# Altium PCB CounterPcb.PcbDoc
Units mm, origin at the board's own origin, x right, y up, seen from the top; angles counter-clockwise.
Board outline 152.4 x 101.6 mm, 2 copper layers (Top Layer, Bottom Layer); 12 components, 36 nets, 138 pads, 3 vias.
Unrouted connection lines stored in the file: 25.
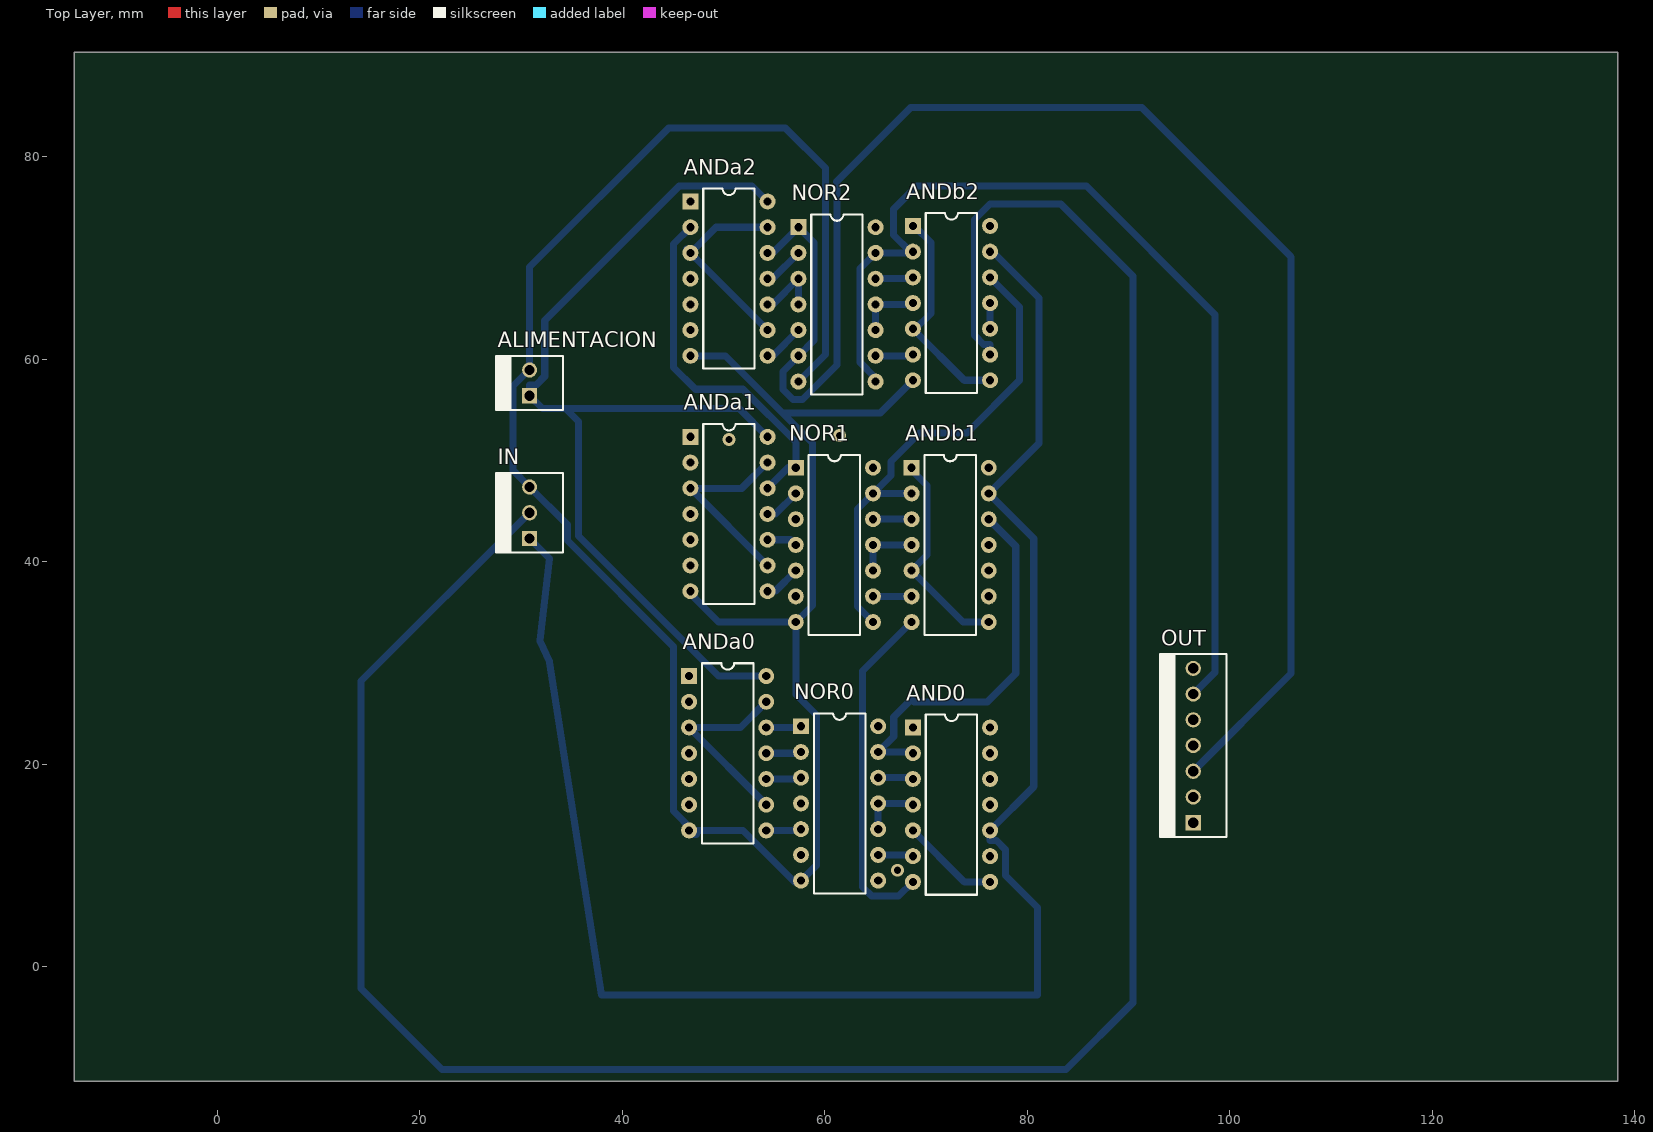
[diagram p0: Top Layer view]
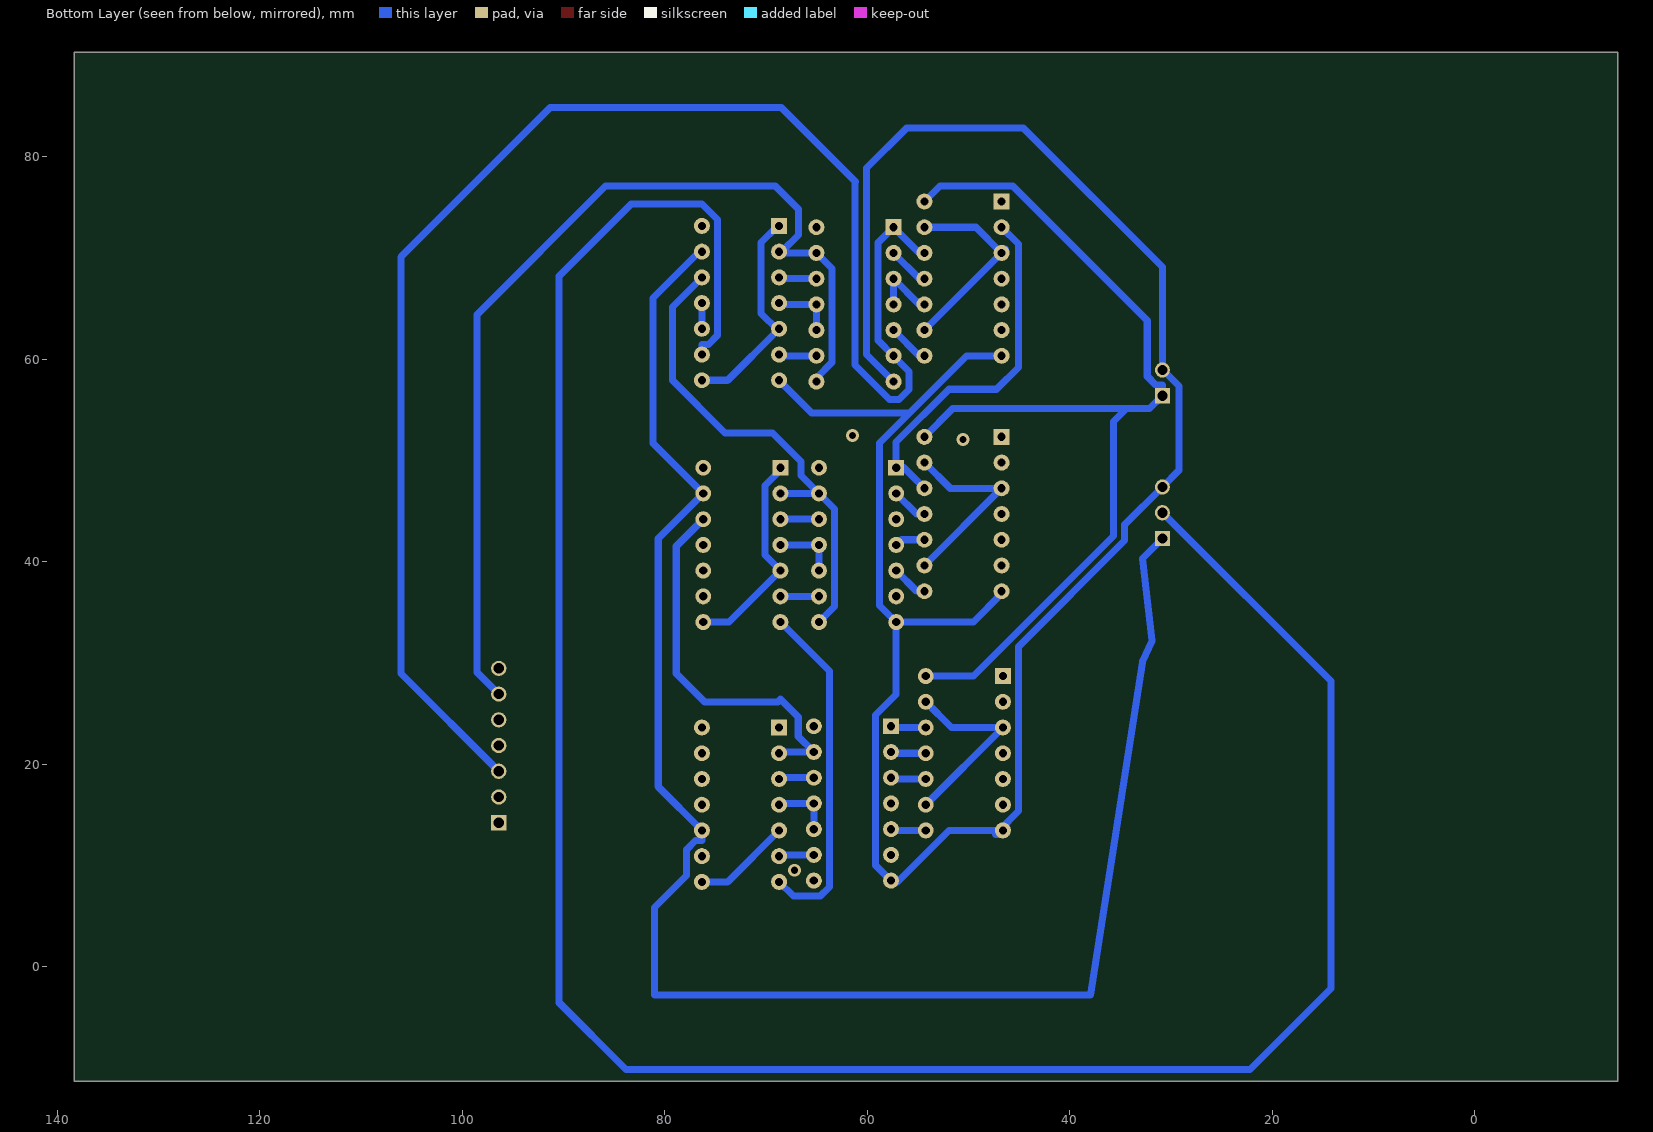
[diagram p1: Bottom Layer view, seen from below]

## Layer stack, top to bottom
Top Solder: solder mask 0.0102, Solder Resist, Dk 3.5
Top Layer: signal copper 0.0356
Dielectric 1: dielectric 0.32, FR-4, Dk 4.8
Bottom Layer: signal copper 0.0356
Bottom Solder: solder mask 0.0102, Solder Resist, Dk 3.5

## Board outline
-14.097,-11.303 138.303,-11.303 138.303,90.297 -14.097,90.297

## Design rules (kind name [scope] priority, off if disabled: settings)
Clearance [All] p1: gap=0.4 ignorepadtopadclearanceinfootprint=FALSE
PolygonConnect [All] p1: connectstyle=Relief reliefconductorwidth=0.254 reliefentries=4 polygonreliefangle="90 Angle" airgapwidth=0.254
RoutingVias [All] p1: holewidth=0.5 width=2 viastyle="Through Hole" minholewidth=0.3 minwidth=1.5 maxholewidth=0.5 maxwidth=2
SolderMaskExpansion [All] p1: expansion=0.102
Width [All] p1: maxlimit=0.9 minlimit=0.6 preferedwidth=0.7
30 further rules are at their usual default settings.

## Components (designator, comment, footprint, x,y, rotation, side; value= is the part's Value field where it differs from the comment)
ALIMENTACION "MOLEX2" MOLEX2 30.861,56.388 r90 top
AND0 "74HC08" DIP14 68.707,23.622 r0 top
ANDa0 "74HC08" DIP14 46.609,28.702 r0 top
ANDa1 "74HC08" DIP14 46.736,52.324 r0 top
ANDa2 "74HC08" DIP14 46.736,75.565 r0 top
ANDb1 "74HC08" DIP14 68.58,49.276 r0 top
ANDb2 "74HC08" DIP14 68.707,73.152 r0 top
IN "MOLEX3" MOLEX3 30.861,42.291 r90 top
NOR0 "74HC02" DIP14 57.658,23.749 r0 top
NOR1 "74HC02" DIP14 57.15,49.276 r0 top
NOR2 "74HC02" DIP14 57.404,73.025 r0 top
OUT "MOLEX7" MOLEX7 96.393,14.224 r90 top

## Footprints (in the part's own frame and the unit in brackets; to place one, negate y for a bottom-side part, rotate by r counter-clockwise, add the part's x,y. Pads: shape width x height; smd on the part's side, far side on the other; paste and mask are expansions set on the pad)
DIP14 [mil]
  rect 62x62 hole 32: 1(0,0)
  round 62 hole 32: 2(0,-100) 3(0,-200) 4(0,-300) 5(0,-400) 6(0,-500) 7(0,-600) 8(300,-600) 9(300,-500) 10(300,-400) 11(300,-300) 12(300,-200) 13(300,-100) 14(300,0)
  silkscreen extent 50,-650 250,50, body extent -5,-675 305,75, height 165
MOLEX2 [mm]
  rect 1.5x1.5 hole 1.016: 1(0,0)
  round 1.5 hole 1.016: 2(2.54,0)
  silkscreen extent -1.4,-3.3 3.94,3.3, body extent -1.27,-3.17 3.81,3.18, height 10.74
MOLEX3 [mm]
  rect 1.5x1.5 hole 1.016: 1(0,0)
  round 1.5 hole 1.016: 2(2.54,0) 3(5.08,0)
  silkscreen extent -1.4,-3.3 6.48,3.3, body extent -1.27,-3.17 6.35,3.18, height 10.74
MOLEX7 [mm]
  rect 1.5x1.5 hole 1.016: 1(0,0)
  round 1.5 hole 1.016: 2(2.54,0) 3(5.08,0) 4(7.62,0) 5(10.16,0) 6(12.7,0) 7(15.24,0)
  silkscreen extent -1.4,-3.3 16.64,3.3, body extent -1.27,-3.17 16.51,3.18, height 10.74

## Part data
AND0 ANDa0 ANDa1 ANDa2 ANDb1 ANDb2 NOR0 NOR1 NOR2: library part IC_DIP14

## Via types
v1: diameter 1.27, hole 0.711, Top Layer to Bottom Layer, 3 vias

## Nets (pads, with @x,y where several pads share a name; then routed paths per layer and width w, separated by ;. In a path a pad name is that pad's centre, name@x,y a point inside that pad or via, vN(x,y) a via of type N, cw(c..) or ccw(c..) an arc to the next point about the centre after c; other vN are vias at no path point)
+VCC: ALIMENTACION.1 AND0.14 ANDa0.14 ANDa1.14 ANDa2.14 ANDb1.14 ANDb2.14 NOR0.14 NOR1.14 NOR2.14 | length 99.4
  Bottom Layer w0.7: ANDa0.14 49.53,28.702 35.687,42.545 35.687,53.848 34.417,55.118 ; ANDa1.14 51.562,55.118 34.417,55.118 ; ANDa2.14 52.819,77.102 45.638,77.102 32.361,63.825 32.361,58.307 31.482,57.428 30.861,57.428 ALIMENTACION.1 32.131,55.118 34.417,55.118 ; NOR2.14 NOR2.14@65.024,73.279
E: AND0.9 ANDa0.2 ANDb1.9 ANDb2.9 IN.2 | length 241.5
  Bottom Layer w0.7: IN.2 30.84,44.831 14.224,28.215 14.224,-2.159 22.225,-10.16 83.82,-10.16 90.424,-3.556 90.424,68.199 83.312,75.311 76.312,75.311 74.79,73.789 74.79,62.355 75.69,61.455 76.327,61.455 ANDb2.9
GND: ALIMENTACION.2 AND0.7 ANDa0.7 ANDa1.7 ANDa2.7 ANDb1.7 ANDb2.7 IN.3 NOR0.7 NOR1.7 NOR2.7 OUT.7 | length 257.7
  Bottom Layer w0.7: ANDa1.7 46.736,36.83 49.53,34.036 NOR1.7 ; ANDa2.7 50.197,60.325 55.832,54.689 ; NOR0.7@57.023,8.382 51.943,13.462 ANDa0.7@46.975,13.462 ; NOR2.7 60.071,60.452 60.071,78.867 56.134,82.804 44.577,82.804 30.861,69.088 ALIMENTACION.2 30.805,58.928 29.21,57.333 29.21,49.022 IN.3 34.587,43.645 34.587,42.089 45.072,31.605 45.072,15.365 ANDa0.7@46.975,13.462 ; NOR0.7 57.679,8.509 59.195,10.025 59.195,24.847 57.15,26.892 NOR1.7 ; ANDb1.7 63.741,29.197 63.741,7.872 64.641,6.972 67.297,6.972 AND0.7 ; ANDb2.7 65.484,54.689 55.832,54.689 ; ANDa0.7@46.975,13.462 47.356,13.081 46.609,13.081 ANDa0.7 ANDa0.7@46.975,13.462 ; 55.832,54.689 58.801,51.721 58.801,35.687 NOR1.7
NetAND0_4: AND0.4 NOR0.10 NOR0.11 | length 6
  Bottom Layer w0.7: NOR0.10 NOR0.11 68.58,16.129 AND0.4
NetANDb1_4: ANDb1.4 NOR1.10 NOR1.11 | length 6.3
  Bottom Layer w0.7: NOR1.10 NOR1.11 ANDb1.4
NetANDb2_4: ANDb2.4 NOR2.10 NOR2.11 | length 5.5
  Bottom Layer w0.7: NOR2.10 NOR2.11 67.564,65.405 ANDb2.4@67.945,65.405
nQ0: ANDa0.10 NOR0.3 NOR0.4 | length 2.8
  Bottom Layer w0.7: ANDa0.10 NOR0.3@57.023,18.542
nQ1: ANDa1.10 NOR1.3 NOR1.4 | length 3
  Bottom Layer w0.7: ANDa1.10 56.642,42.164 NOR1.4
nQ2: ANDa2.10 NOR2.3 NOR2.4 | length 6.6
  Bottom Layer w0.7: ANDa2.10 54.864,65.405 NOR2.3 NOR2.4
Q0: ANDa0.12 ANDa1.2 NOR0.1 NOR0.6 OUT.1 | length 2.8
  Bottom Layer w0.7: ANDa0.12 NOR0.1@57.023,23.622
Q0b: AND0.2 ANDb1.12 NOR0.8 NOR0.13 OUT.4 | length 38
  Bottom Layer w0.7: AND0.2 68.58,21.209 NOR0.13 66.815,22.746 66.815,24.651 68.58,26.416 68.834,26.162 76.073,26.162 78.867,28.956 78.867,41.529 ANDb1.12
Q1: ANDa1.12 ANDa2.2 NOR1.1 NOR1.6 OUT.2 | length 35.8
  Bottom Layer w0.7: ANDa2.2 45.085,71.374 45.085,59.182 47.244,57.023 51.943,57.023 57.15,51.816 NOR1.1 56.388,49.276 ANDa1.12
Q1b: ANDb1.2 ANDb2.12 NOR1.8 NOR1.13 OUT.5 | length 49.1
  Bottom Layer w0.7: NOR1.8 63.233,35.573 63.233,45.199 NOR1.13 ; ANDb1.2 NOR1.13 ; ANDb2.12 79.248,65.151 79.248,57.912 74.041,52.705 69.374,52.705 66.548,49.879 66.548,48.514 NOR1.13
Q2: ANDa2.12 NOR2.1 NOR2.6 OUT.3 | length 156.1
  Bottom Layer w0.7: ANDa2.12 54.864,70.485 NOR2.1 58.941,71.488 58.941,61.862 NOR2.6 55.867,58.788 55.867,57.01 56.869,56.007 57.8,56.007 61.214,59.421 61.214,77.47 61.171,77.513 68.494,84.836 91.313,84.836 106.045,70.104 106.045,28.956 OUT.3
Q2b: ANDb2.2 NOR2.8 NOR2.13 OUT.6 | length 99.2
  Bottom Layer w0.7: NOR2.8 65.024,58.151 63.487,59.688 63.487,68.948 NOR2.13 ANDb2.2@68.834,70.485 ; ANDb2.2 68.453,70.612 66.802,72.263 66.802,74.803 69.088,77.089 85.852,77.089 98.552,64.389 98.552,29.083 OUT.6
T: AND0.10 ANDa0.1 ANDa1.1 ANDa2.1 ANDb1.13 ANDb2.13 IN.1 | length 172.7
  Bottom Layer w0.7: IN.1 32.839,40.313 31.877,32.216 32.845,30.091 37.97,-2.794 81.026,-2.794 81.026,5.842 77.864,9.004 77.864,11.559 76.964,12.459 76.327,12.459 AND0.10 80.645,17.78 80.645,42.291 ANDb1.13 81.153,51.689 81.153,66.04 ANDb2.13@76.708,70.485
T1b: ANDb1.10 ANDb1.11
T2b: ANDb2.10 ANDb2.11 | length 2.5
  Bottom Layer w0.7: ANDb2.10 ANDb2.11
TxE0: ANDa0.3 ANDa0.9 ANDa0.13 | length 19.4
  Bottom Layer w0.7: ANDa0.9 ANDa0.3 51.689,23.622 ANDa0.13
TxE0b: AND0.1 AND0.5 AND0.8 | length 9.7
  Bottom Layer w0.7: AND0.5 73.787,8.382 AND0.8
TxE1: ANDa1.3 ANDa1.9 ANDa1.13 | length 19.4
  Bottom Layer w0.7: ANDa1.9 ANDa1.3 51.816,47.244 ANDa1.13
TxE1b: ANDb1.1 ANDb1.5 ANDb1.8 | length 21.2
  Bottom Layer w0.7: ANDb1.1@68.601,49.276 ANDb1.1 68.58,49.051 70.117,47.513 70.117,40.653 ANDb1.5 73.66,34.036 ANDb1.8
TxE2: ANDa2.3 ANDa2.9 ANDa2.13 | length 20
  Bottom Layer w0.7: ANDa2.3@46.355,70.866 ANDa2.3 ; ANDa2.9 ANDa2.3 ; ANDa2.13 49.276,73.025 ANDa2.3
TxE2b: ANDb2.1 ANDb2.5 ANDb2.8 | length 21.2
  Bottom Layer w0.7: ANDb2.5 ANDb2.5@68.834,62.865 ; ANDb2.1@68.961,73.025 70.485,71.501 70.485,64.516 ANDb2.5@68.834,62.865 ; ANDb2.8 73.787,57.912 ANDb2.5@68.834,62.865
TxExnQ0: ANDa0.8 NOR0.5 | length 2.8
  Bottom Layer w0.7: ANDa0.8 NOR0.5@57.023,13.462
TxExnQ0b: AND0.6 NOR0.9 | length 3.5
  Bottom Layer w0.7: NOR0.9 68.58,11.049 AND0.6
TxExnQ1: ANDa1.8 NOR1.5 | length 3.6
  Bottom Layer w0.7: ANDa1.8 55.118,37.084 NOR1.5
TxExnQ1b: ANDb1.6 NOR1.9 | length 3.8
  Bottom Layer w0.7: NOR1.9 ANDb1.6
TxExnQ2: ANDa2.8 NOR2.5 | length 4.1
  Bottom Layer w0.7: ANDa2.8 54.864,60.325 NOR2.5
TxExnQ2b: ANDb2.6 NOR2.9 | length 2.9
  Bottom Layer w0.7: NOR2.9 ANDb2.6@67.945,60.325
TxExQ0: ANDa0.11 NOR0.2 | length 2.8
  Bottom Layer w0.7: ANDa0.11 NOR0.2@57.023,21.082
TxExQ0b: AND0.3 NOR0.12 | length 3.5
  Bottom Layer w0.7: NOR0.12 68.58,18.669 AND0.3
TxExQ1: ANDa1.11 NOR1.2 | length 3.6
  Bottom Layer w0.7: ANDa1.11 55.118,44.704 NOR1.2
TxExQ1b: ANDb1.3 NOR1.12 | length 3.8
  Bottom Layer w0.7: NOR1.12 ANDb1.3
TxExQ2: ANDa2.11 NOR2.2 | length 4.1
  Bottom Layer w0.7: ANDa2.11 54.864,67.945 NOR2.2
TxExQ2b: ANDb2.3 NOR2.12 | length 2.9
  Bottom Layer w0.7: NOR2.12 ANDb2.3@67.945,67.945
pads on no net: AND0.11 AND0.12 AND0.13 ANDa0.4 ANDa0.5 ANDa0.6 ANDa1.4 ANDa1.5 ANDa1.6 ANDa2.4 ANDa2.5 ANDa2.6
copper on no net:
  other v1: 67.183,9.525 50.546,52.07 61.468,52.451